# Altium PCB PCB_ElectricMeter_1Phase.PcbDoc
Units mm, origin at the board's own origin, x right, y up, seen from the top; angles counter-clockwise.
Board outline 85 x 85 mm, 2 copper layers (Top Layer, Bottom Layer), stack 1.671 mm thick; 14 components, 10 nets, 64 pads, 2 vias.
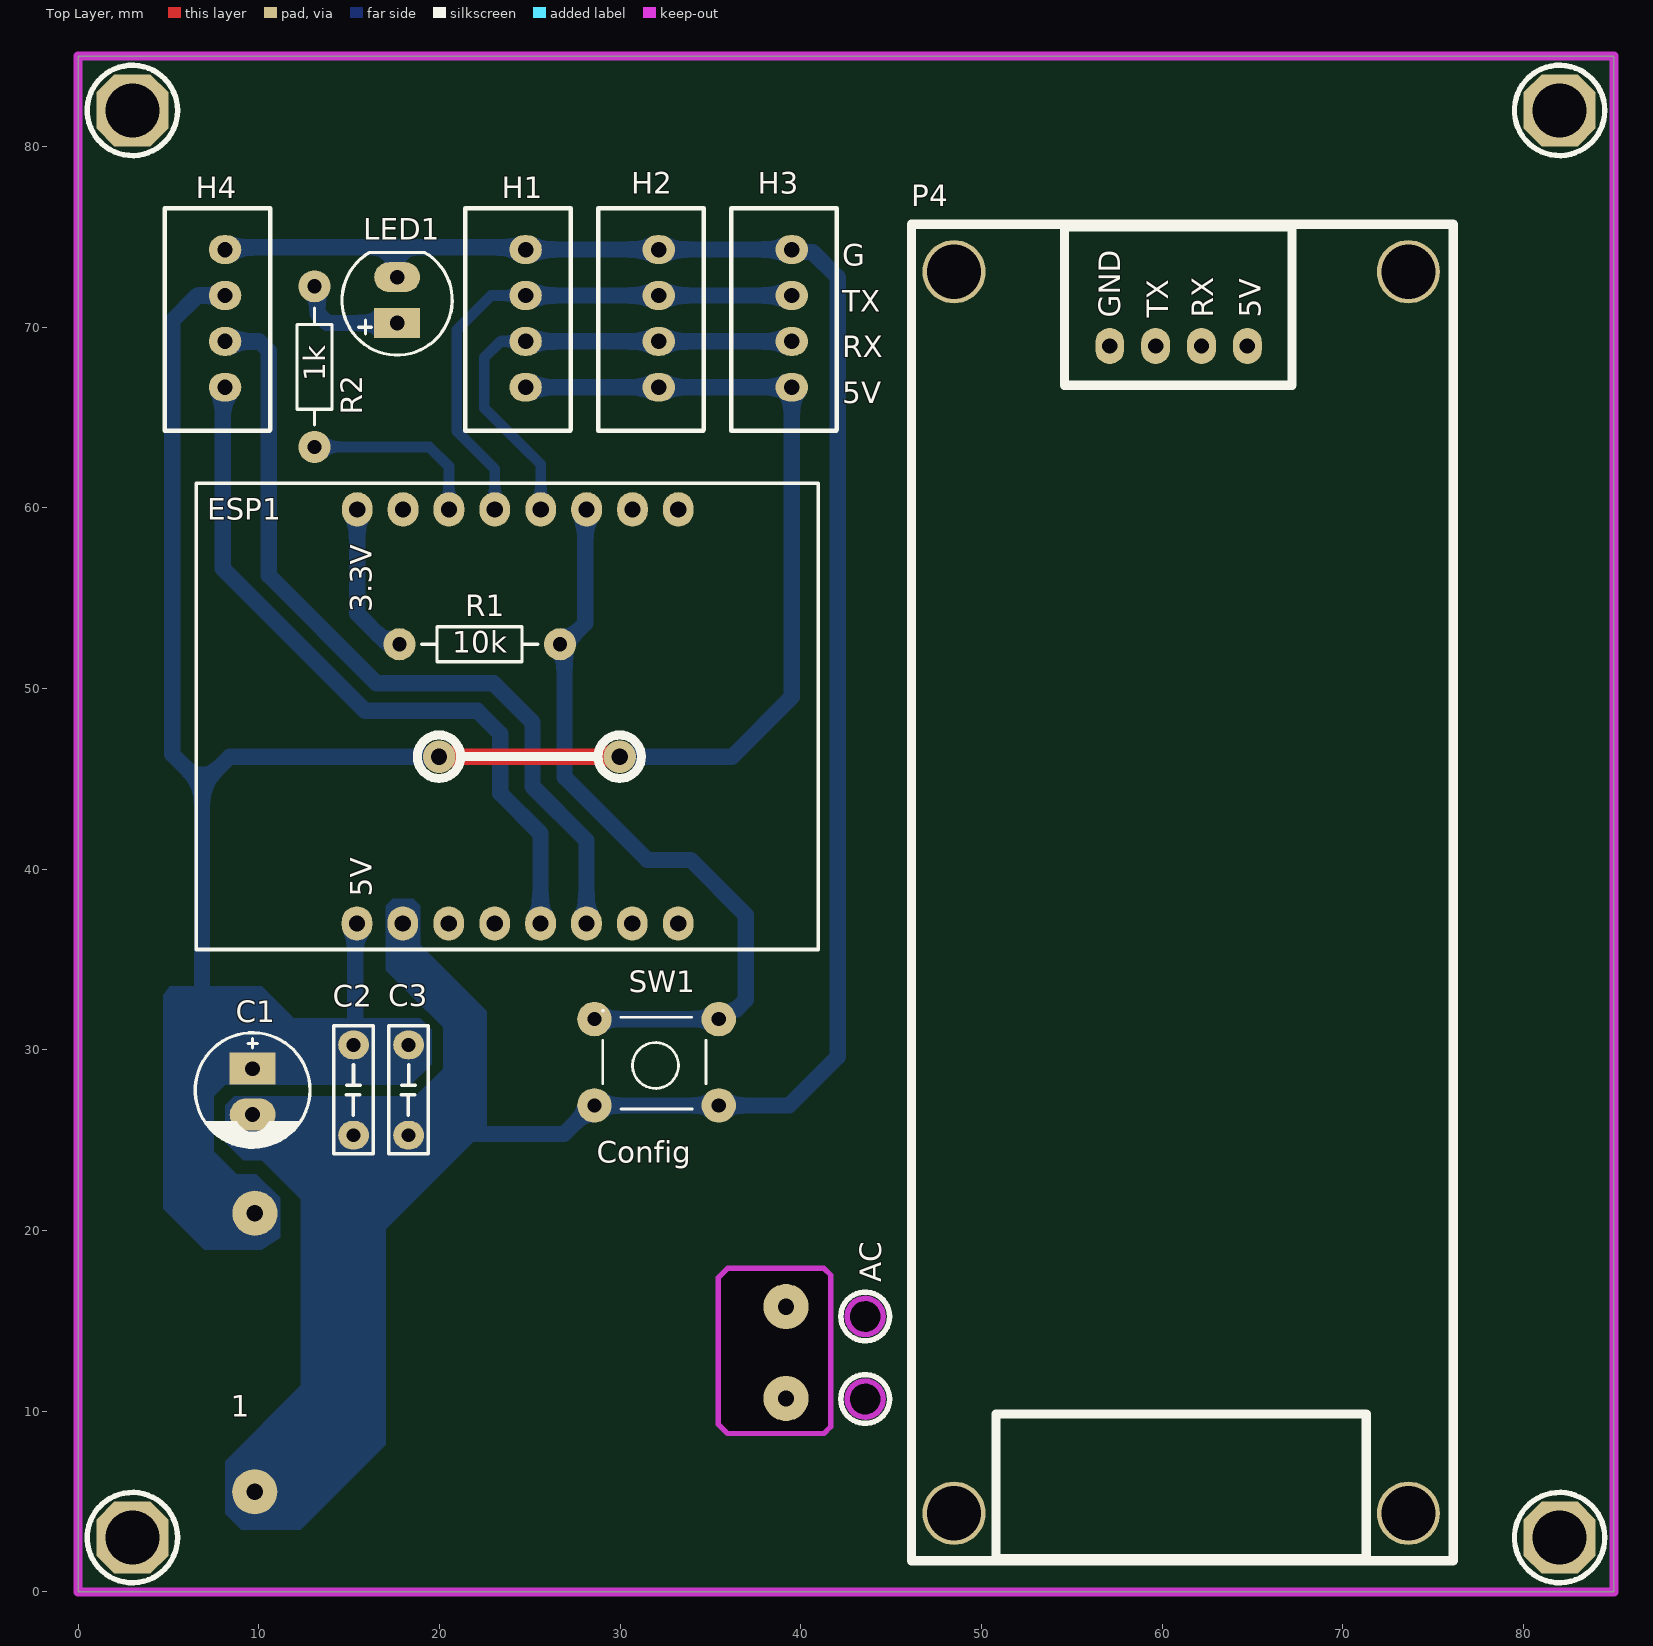
[diagram p0: Top Layer view]
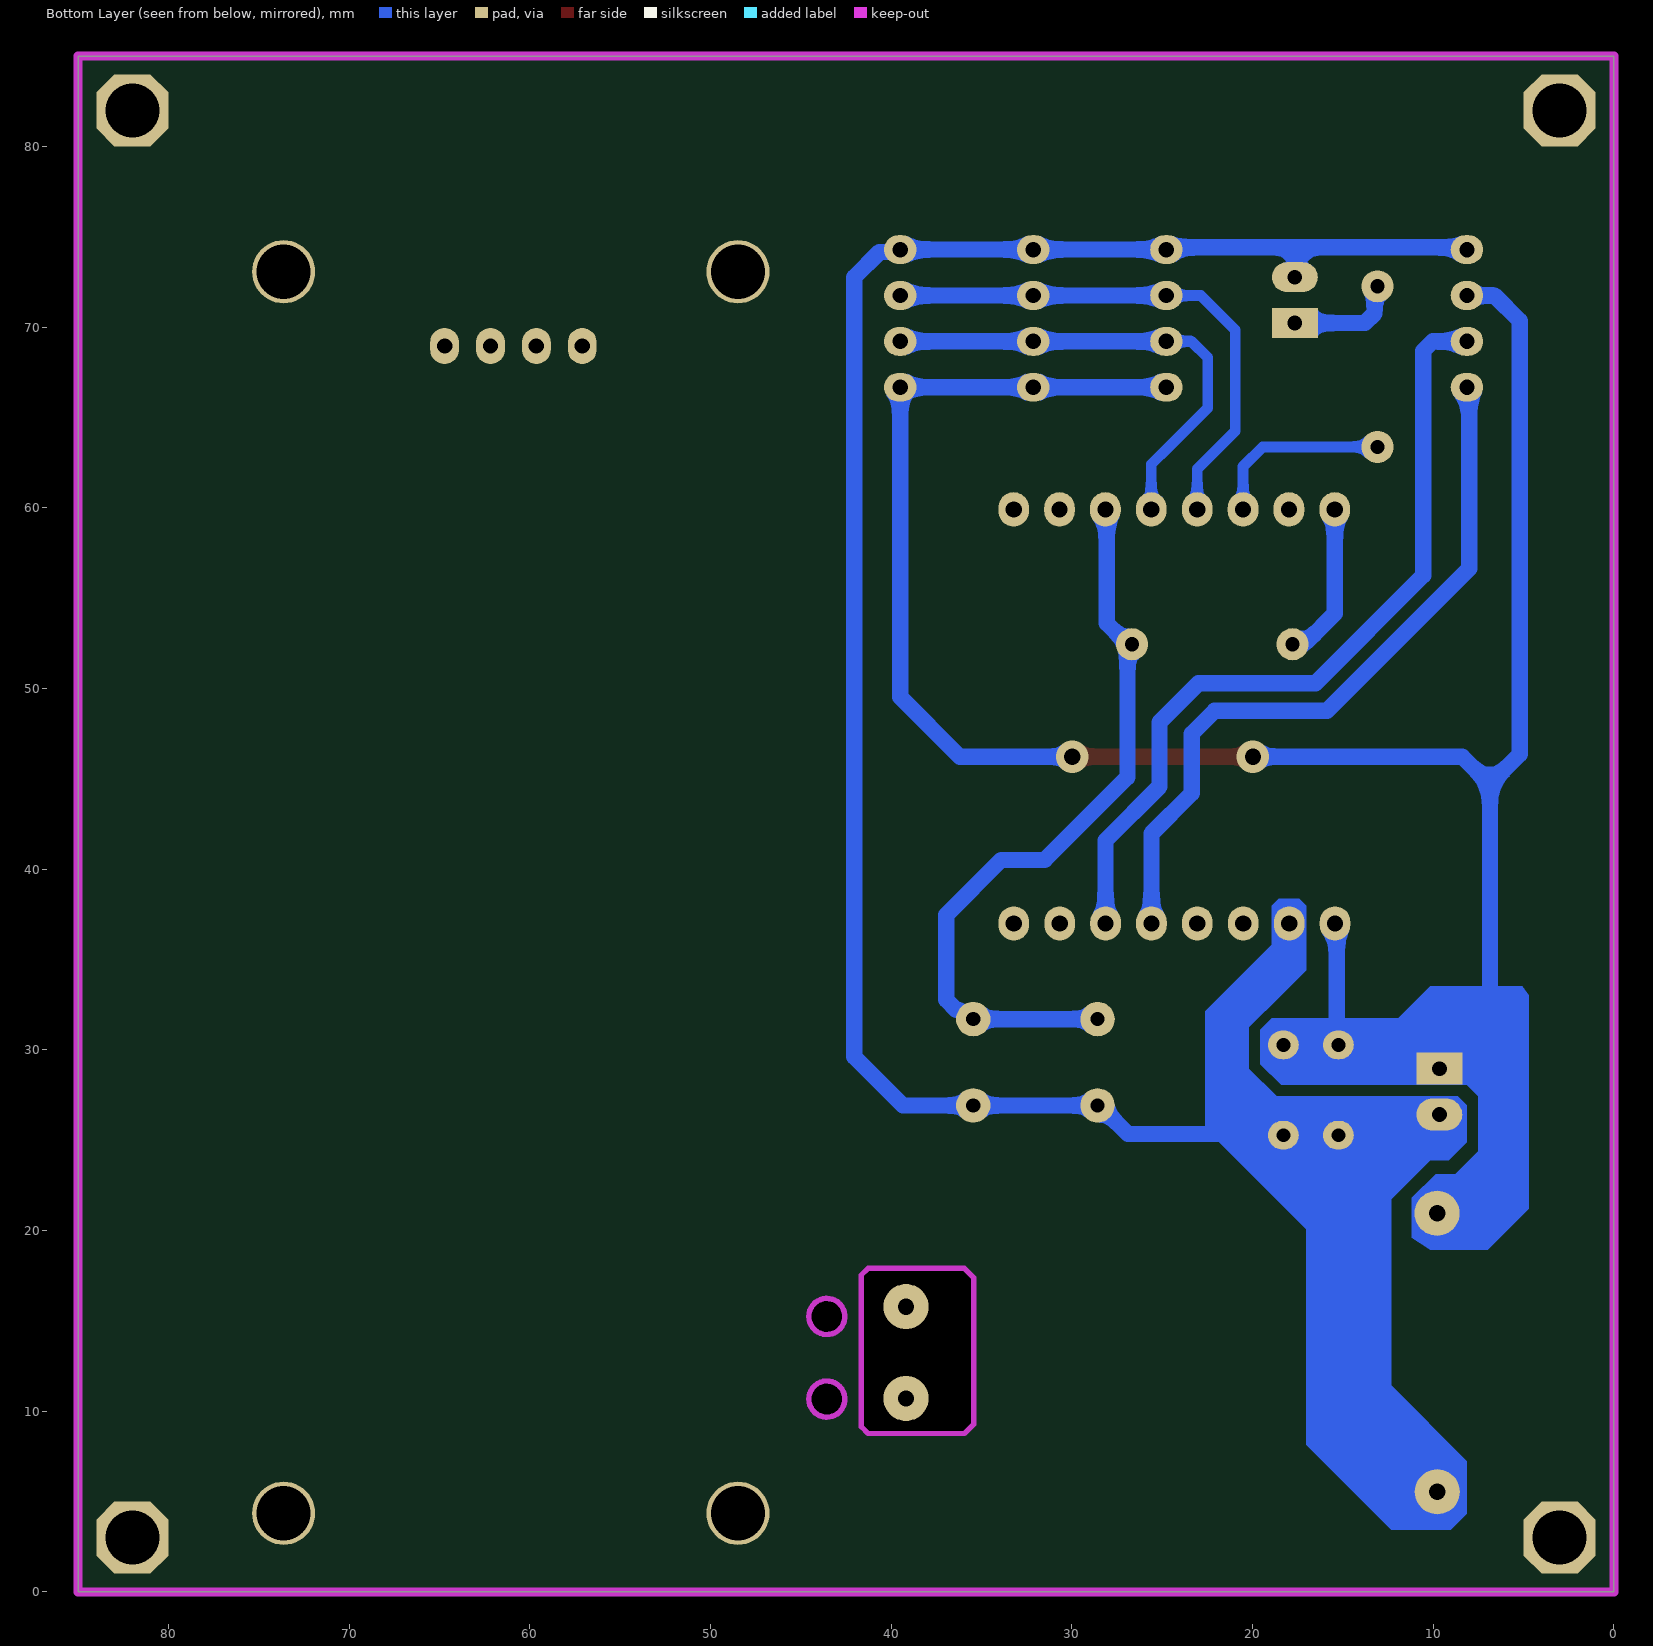
[diagram p1: Bottom Layer view, seen from below]
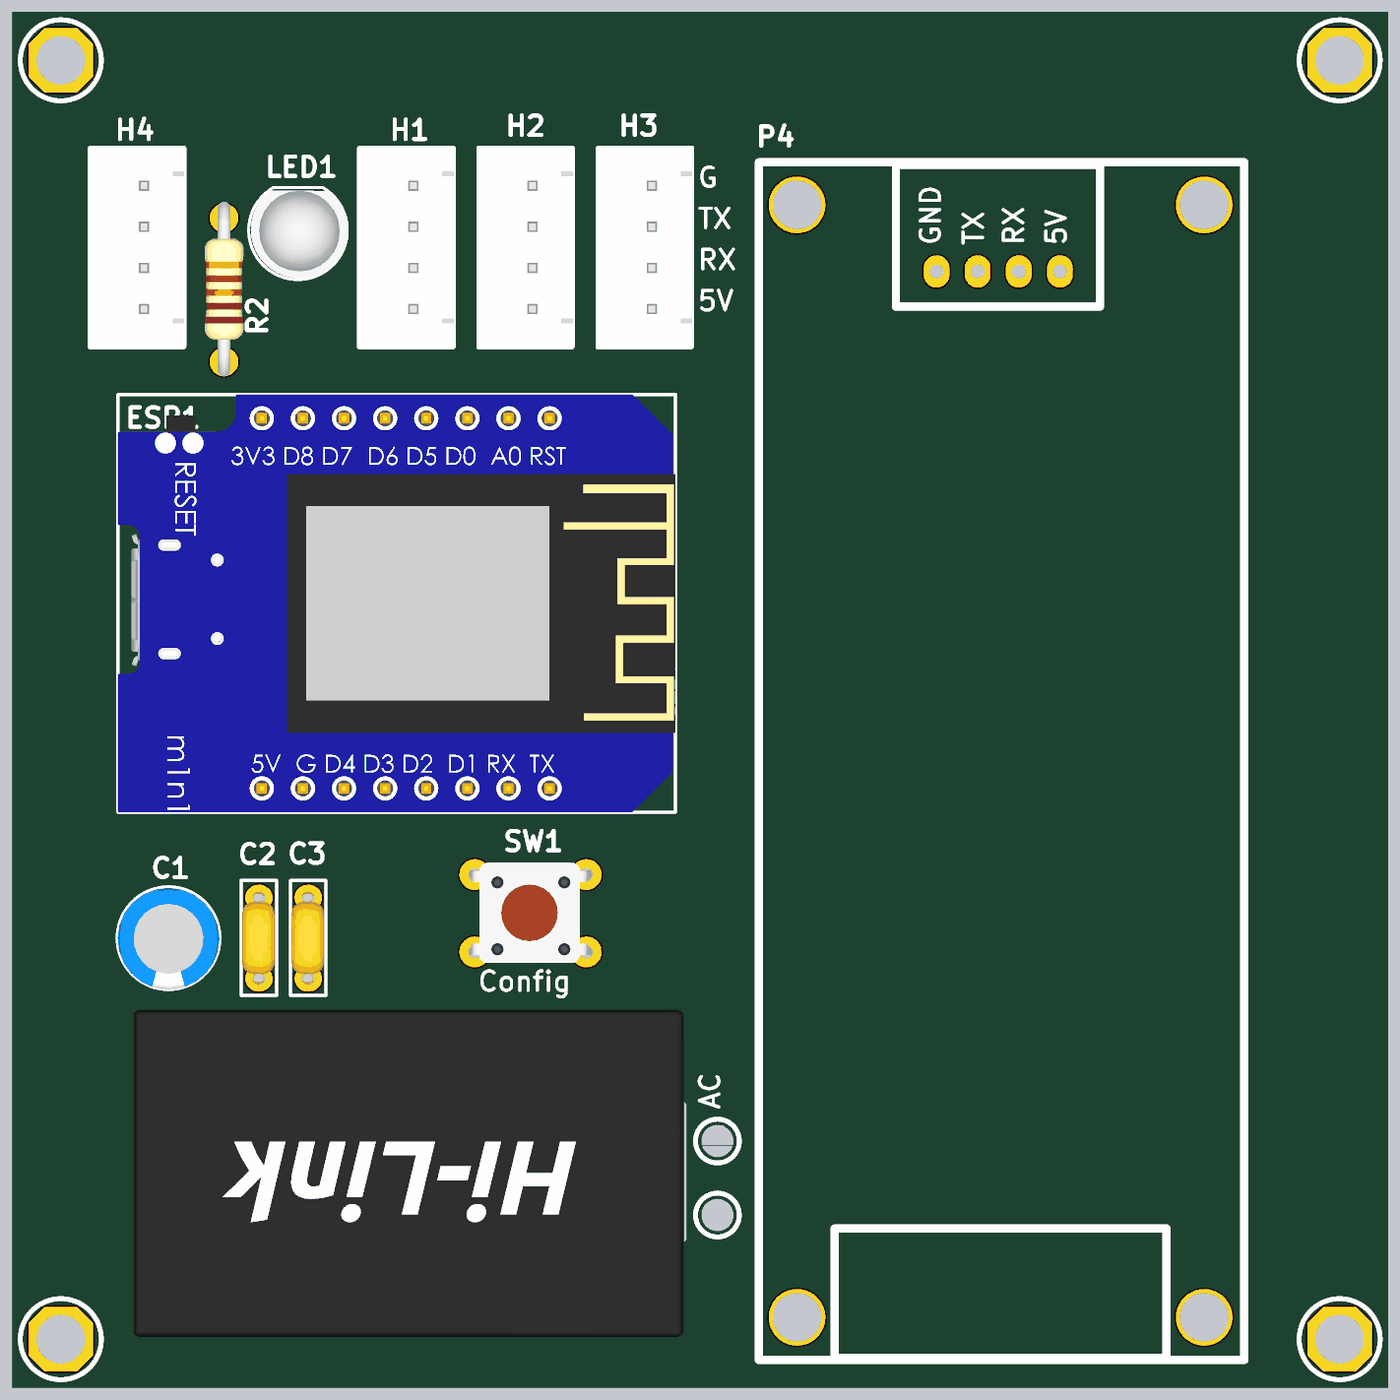
[diagram p2: 3D render of the assembled board from above, using the file's embedded part models]

## Layer stack, top to bottom
Top Solder: solder mask 0.0102, Solder Resist, Dk 3.5
Top Layer: signal copper 0.0356
Dielectric 1: dielectric 1.6, FR-4, Dk 4.8
Bottom Layer: signal copper 0.0356
Bottom Solder: solder mask 0.0102, Solder Resist, Dk 3.5

## Board outline
0,0 0,85 85,85 85,0
cut-out: 42.561,10.668 ccw(c43.561,10.668) 43.561,9.668 ccw(c43.561,10.668) 44.561,10.668 ccw(c43.561,10.668) 43.561,11.668 ccw(c43.561,10.668)
cut-out: 42.561,15.24 ccw(c43.561,15.24) 43.561,14.24 ccw(c43.561,15.24) 44.561,15.24 ccw(c43.561,15.24) 43.561,16.24 ccw(c43.561,15.24)
cut-out: 35.433,9.271 35.433,17.399 35.941,17.907 41.275,17.907 41.656,17.526 41.656,9.144 41.275,8.763 35.941,8.763

## Design rules (kind name [scope] priority, off if disabled: settings)
Clearance [All] p1: gap=0.3 ignorepadtopadclearanceinfootprint=FALSE
PolygonConnect [All] p1: connectstyle=Relief reliefconductorwidth=0.254 reliefentries=4 polygonreliefangle="90 Angle" airgapwidth=0.254
RoutingVias [All] p1: holewidth=0.711 width=1.27 viastyle="Through Hole" minholewidth=0.711 minwidth=1.27 maxholewidth=2 maxwidth=3
SolderMaskExpansion [All] p1: expansion=0.102 istentingtop=FALSE
Width [All] p1: maxlimit=2 minlimit=0.6 preferedwidth=0.9
30 further rules are at their usual default settings.

## Components (designator, comment, footprint, x,y, rotation, side; value= is the part's Value field where it differs from the comment)
1 "Hi Link 3W" "Hi Link 3W" 42.809,27.415 r180 top
C1 "220uF - 16V" CP1/2.5 9.652,28.956 r270 top
C2 "104" "Cap 104 5mm" 15.24,25.273 r90 top
C3 "104" "Cap 104 5mm" 18.288,25.273 r90 top
ESP1 "Esp8266 D1 Mini" "ESP8266 D1 mini" 25.781,50.165 r270 top
H1 "PZEM1" "Header 4P 2.54" 24.765,66.675 r90 top
H2 "PZEM2" "Header 4P 2.54" 32.131,66.675 r90 top
H3 "PZEM3" "Header 4P 2.54" 39.497,66.675 r90 top
H4 "OLED_I2C" "Header 4P 2.54" 8.128,66.675 r90 top
LED1 "LED" LED-5-Yellow 17.653,70.231 r90 top
P4 "pzem 004t power sine" "PZEM004T High" 87.63,0.508 r90 top
R1 "10k" R1/4W 26.67,52.451 r180 top
R2 "1k" R1/4W 13.081,72.263 r270 top
SW1 "Conf" SW4 35.128,26.721 r180 top value="Button chip 4 pin"

## Footprints (in the part's own frame and the unit in brackets; to place one, negate y for a bottom-side part, rotate by r counter-clockwise, add the part's x,y. Pads: shape width x height; smd on the part's side, far side on the other; paste and mask are expansions set on the pad)
"Cap 104 5mm" [mm]
  oval 1.6x1.7 hole 0.762: 1(0,0) 2(5,0)
  silkscreen extent -1.03,-1.09 6.07,1.1, body extent -0.34,-0.96 5.36,1.04, height 5.5
CP1/2.5 [mil] "Tu hoa 33 >100 uF,50V, 220uF/16V,25V"
  rect 70x100 hole 32: 1(0,0)
  oval 70x100 hole 32: 2(100,0)
  silkscreen extent -78,-125 172,125, body extent -76,-124 172,124, height 422
"ESP8266 D1 mini" [mm]
  oval 1.9x1.7 hole 0.9: 1(-9.75,7.44) 2(-9.75,4.9) 3(-9.75,2.36) 4(-9.75,-0.18) 5(-9.75,-2.72) 6(-9.75,-5.26) 7(-9.75,-7.8) 8(-9.75,-10.34) 9(13.17,-10.35) 10(13.17,-7.81) 11(13.17,-5.27) 12(13.17,-2.73) 13(13.17,-0.19) 14(13.17,2.35) 15(13.17,4.89) 16(13.17,7.43)
  silkscreen extent -11.2,-19.25 14.61,15.18, body extent -11.19,-19.26 14.61,15.18, height 11.9
"Header 4P 2.54" [mm]
  oval 1.6x1.8 hole 0.85: 1(0,0) 2(2.54,0) 3(5.08,0) 4(7.62,0)
  silkscreen extent -2.4,-2.5 9.91,3.34, body extent -2.38,-2.5 9.92,3.34, height 7.21
"Hi Link 3W" [mm]
  round 2.5 hole 0.9: 1(3.63,16.71) 2(3.63,11.63) 3(33.04,21.88) 4(33.03,6.46)
  body extent 1.33,4.07 35.33,24.27, height 15.1
LED-5-Yellow [mil] "LED 2 PIN, 5 ly , Only colour,pin to pin 100mil"
  rect 65x100 hole 32: 1(0,0)
  oval 65x100 hole 32: 2(100,0)
  silkscreen extent -70,-120 154,120, body extent -67,-122 147,115, height 339
"PZEM004T High" [mm] "AC POWER V3 220V"
  round 3.5 hole 3: 0(3.84,39.15) 0(3.84,14) 0(72.56,14) 0(72.56,39.15)
  oval 2x1.6 hole 0.85: 1(68.45,22.91) 2(68.45,25.45) 3(68.45,27.99) 4(68.45,30.53)
  silkscreen extent 1.21,11.52 75.19,41.51, body extent 0.97,11.79 75.17,41.79, height 21.04
R1/4W [mil] "R 1/4W, 2 Pin, 350mil"
  round 70 hole 31: 1(0,0) 2(350,0)
  silkscreen extent 48,-38 302,38, body extent -40,-47 386,47, height 111
SW4 [mil] "SW button 4pin, 250 x250 mil"
  round 75 hole 31: 1(-13,-8) 1(258,-8) 2(-13,-196) 2(258,-196)
  silkscreen extent 15,-215 240,0, body extent -31,-225 281,19, height 276

## Part data
C1: library part "CAP hoa", "Cap"
C2 C3: library part CAP
H1 H2 H3 H4: library part "Header 4P"
LED1: "LED Single colour Green and Red"
P4: library part PZEM
R1 R2: library part "Res DIP", "Res"
SW1: library part SW4, "Switch button 4 pin"

## Free pads (board coordinates)
  oct 4x4 hole 3: ""(3,3) ""(3,82) ""(82,3) ""(82,82)

## Via types
v1: diameter 1.8, hole 0.9, Top Layer to Bottom Layer, 2 vias

## Nets (pads, with @x,y where several pads share a name; then routed paths per layer and width w, separated by ;. In a path a pad name is that pad's centre, name@x,y a point inside that pad or via, vN(x,y) a via of type N, cw(c..) or ccw(c..) an arc to the next point about the centre after c; other vN are vias at no path point)
+3.3V: ESP1.8 R1.2 | length 8.8
  Bottom Layer w0.9: ESP1.8 15.441,54.155 16.977,52.619 17.612,52.619 R1.2
+5V: 1.4 C1.1 C2.2 C3.2 ESP1.9 H1.1 H2.1 H3.1 H4.3 | length 140
  Top Layer w0.9: v1(19.972,46.228) v1@29.562,46.228
  Bottom Layer w0.9: 6.858,29.591 7.366,29.083 ; 6.858,32.639 6.858,44.704 ; H4.3 6.604,71.755 5.207,70.358 5.207,46.355 6.858,44.704 ; C1.1 9.456,28.956 9.329,29.083 7.366,29.083 ; 1.4 9.751,20.983 6.35,20.983 5.716,21.617 5.716,28.183 6.166,28.633 6.916,28.633 7.366,29.083 ; C1.1@10.033,28.956 11.684,30.607 15.017,30.607 C2.2@15.295,30.328 ; C2.2 C2.2@15.295,30.328 ; ESP1.9@15.431,37.095 ESP1.9 15.336,36.9 15.336,30.369 C2.2@15.295,30.328 ; C3.2 15.351,30.273 C2.2@15.295,30.328 ; v1(19.972,46.228) 8.382,46.228 6.858,44.704 ; H1.1 H2.1 H3.1 39.497,49.53 36.195,46.228 v1(29.972,46.228)
ConfigWifi: ESP1.3 R1.1 SW1.2 | length 42.4
  Bottom Layer w0.9: ESP1.3 28.067,59.841 28.067,53.61 26.908,52.451 R1.1 26.838,52.283 26.838,51.902 26.924,51.816 26.924,45.085 31.496,40.513 33.909,40.513 36.957,37.465 36.957,35.052 36.957,32.766 36.393,32.202 36.233,32.202 35.73,31.699 SW1.2@28.575,31.699
GND: 1.3 C1.2 C2.1 C3.1 ESP1.10 H1.4 H2.4 H3.4 H4.4 LED1.2 SW1.1 | length 152.4
  Bottom Layer w0.9: H4.4@8.798,74.422 17.526,74.422 ; C1.2 C1.2@9.795,26.416 ; 1.3 9.53,5.535 9.077,5.989 9.077,7.127 13.716,11.766 13.716,21.381 10.201,24.896 10.201,26.01 C1.2@9.795,26.416 ; LED1.2 17.526,72.898 17.526,74.422 ; ESP1.10 17.971,34.734 21.209,31.496 21.209,28.144 18.567,25.502 18.517,25.502 C3.1 C2.1 15.001,25.273 13.858,26.416 10.201,26.416 C1.2@9.795,26.416 ; C3.1@18.412,25.347 26.896,25.347 28.473,26.924 28.575,26.924 35.458,26.924 39.351,26.924 42.037,29.61 42.037,72.771 40.647,74.161 39.631,74.161 H3.4 H2.4 H1.4 24.638,74.422 17.526,74.422
LED_Status: ESP1.6 R2.2 | length 10.3
  Bottom Layer w0.6: R2.2 19.431,63.373 20.521,62.283 ESP1.6
NetLED1_1: LED1.1 R2.1 | length 6.2
  Bottom Layer w0.9: R2.1 13.249,72.095 13.249,70.758 13.776,70.231 LED1.1
OLED_SCL: ESP1.14 H4.2 | length 45.4
  Bottom Layer w0.9: H4.2 10.014,69.215 10.541,68.688 10.541,56.261 16.51,50.292 22.987,50.292 25.146,48.133 25.146,44.577 28.131,41.592 ESP1.14
OLED_SDA: ESP1.13 H4.1 | length 40.7
  Bottom Layer w0.9: H4.1 8.001,66.548 8.001,56.642 15.875,48.768 22.098,48.768 23.368,47.498 23.368,44.196 25.591,41.973 ESP1.13
RX_PZEM: ESP1.4 H1.2 H2.2 H3.2 | length 27.1
  Bottom Layer w0.6: H1.2 23.368,69.215 22.479,68.326 22.479,65.532 24.638,63.373 25.601,62.41 ESP1.4
  Bottom Layer w0.9: H1.2 H2.2 H3.2
TX_PZEM: ESP1.5 H1.3 H2.3 H3.3 | length 30.1
  Bottom Layer w0.6: ESP1.5 23.061,62.156 20.955,64.262 20.955,69.85 22.86,71.755 H1.3
  Bottom Layer w0.9: H1.3 H2.3 H3.3
pads on no net: 1.1 1.2 ESP1.1 ESP1.2 ESP1.7 ESP1.11 ESP1.12 ESP1.15 ESP1.16 P4.0 P4.1 P4.2 P4.3 P4.4

## Keep-outs
Keep-Out Layer:
  circle w0.3: c43.561,15.24 r1
  circle w0.3: c43.561,10.668 r1
  lines w0.3: 35.433,9.271 35.433,17.399 35.941,17.907 41.275,17.907 41.656,17.526 41.656,9.144 41.275,8.763 35.941,8.763 35.433,9.271
  lines w0.5: 0,0 0,85 85,85 85,0 0,0

## Other copper
Bottom Layer:
  region net +5V: 8.763,23.114 7.493,24.384 7.493,27.432 8.128,28.067 11.176,28.067 18.415,28.067 19.558,29.21 19.558,31.115 18.923,31.75 11.938,31.75 10.16,33.528 5.08,33.528 4.699,33.02 4.699,21.209 6.985,18.923 10.16,18.923 11.176,19.6 11.176,21.804 9.866,23.114
  region net GND: 8.128,7.239 12.319,11.43 12.319,21.717 10.16,23.876 9.144,23.876 8.128,24.892 8.128,26.924 8.636,27.432 18.669,27.432 20.193,28.956 20.193,31.242 18.415,33.02 17.018,34.417 17.018,37.973 17.399,38.354 18.542,38.354 18.923,37.973 18.923,35.814 22.606,32.131 22.606,25.654 18.923,21.971 17.018,20.066 17.018,8.128 12.319,3.429 9.017,3.429 8.128,4.318

## Silkscreen, mask and mechanical layers (free items; w line width, h text height)
Top Overlay:
  circle w0.3: c3,82 r2.501
  circle w0.3: c3,3 r2.501
  circle w0.3: c82,3 r2.501
  circle w0.3: c82,82 r2.501
  circle w0.3: c43.561,10.668 r1.35
  circle w0.3: c43.561,15.24 r1.35
  circle w0.5: c19.972,46.228 r1.2
  circle w0.5: c29.972,46.228 r1.2
  lines w0.5: 21.463,46.228 28.575,46.228
  text "G" at 42.291,73.406 h1.2
  text "TX" at 42.291,70.866 h1.2
  text "RX" at 42.291,68.326 h1.2
  text "5V" at 42.291,65.786 h1.2
  text "3.3V" at 16.256,54.229 h1.2 r90
  text "5V" at 16.256,38.481 h1.2 r90
  text "Config" at 28.702,23.749 h1.2
  text "AC" at 44.45,17.145 h1.2 r90

## Dimensions
85,0 to 85,85 on Mechanical 13
82,3 to 82,82 on Mechanical 13
82,3 to 3,3 on Mechanical 13
0,0 to 85,85 on Mechanical 13

## Text inside footprints (layer, text, board x,y; h text height)
P4: Top Overlay "RX" at 62.821,70.52 h1.2 r90; Top Overlay "5V" at 65.453,70.52 h1.2 r90; Top Overlay "GND" at 57.681,70.52 h1.2 r90; Top Overlay "TX" at 60.337,70.52 h1.2 r90